# Altium PCB Scratch.PcbDoc
Units mil, origin at the board's own origin, x right, y up, seen from the top; angles counter-clockwise.
Board outline 5200 x 2700 mil, 2 copper layers (Top Layer, Bottom Layer), stack 61.756 mil thick; 63 components, 84 nets, 501 pads, 170 vias.
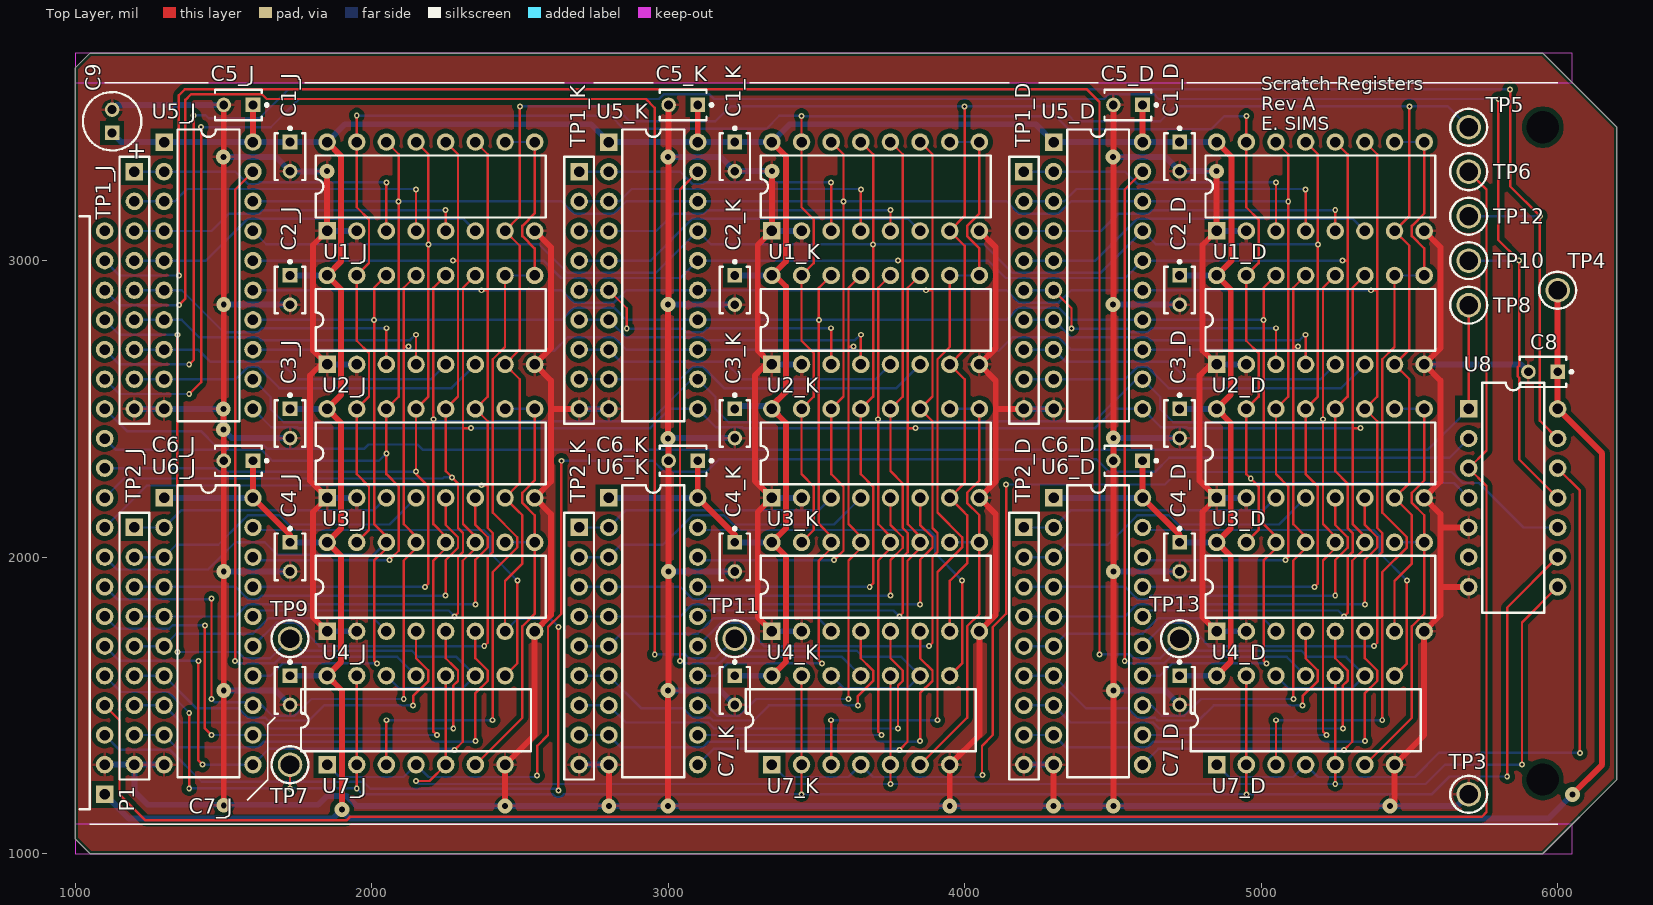
[diagram p0: Top Layer view]
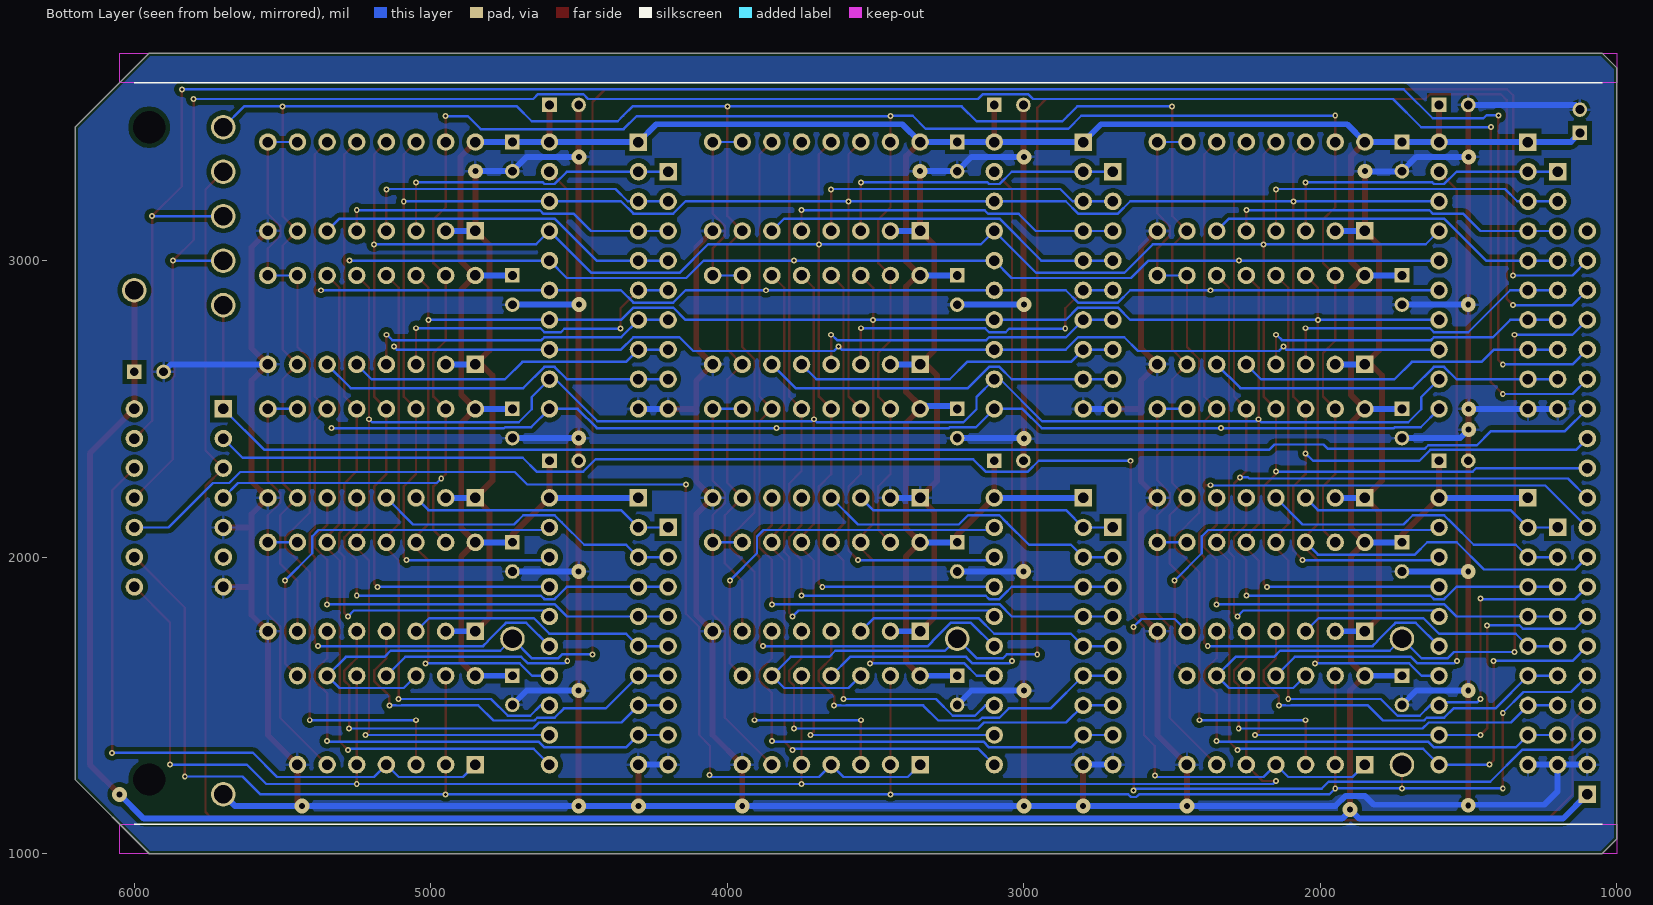
[diagram p1: Bottom Layer view, seen from below]

## Layer stack, top to bottom
Top Solder: solder mask 1, SM-001, Dk 4
Top Layer: signal copper 1.378
Dielectric 1: core 59, Core-043, Dk 4.3
Bottom Layer: signal copper 1.378
Bottom Solder: solder mask 1, SM-001, Dk 4

## Board outline
1000,1050 1050,1000 5950,1000 6200,1250 6200,3450 5950,3700 1050,3700 1000,3650

## Design rules (kind name [scope] priority, off if disabled: settings)
BoardOutlineClearance [All] p1: gap=10 ignorepadtopadclearanceinfootprint=FALSE except(0: Arc-SplitContinuation Track-SplitContinuation SMDPad-SplitContinuation THPad-SplitContinuation Via-SplitContinuation Fill-SplitContinuation Poly-SplitContinuation Region-SplitContinuation Text-SplitContinuation)
Clearance [InPoly] p1: gap=15 ignorepadtopadclearanceinfootprint=FALSE
Clearance Clearance_1 [All] p2: gap=8 ignorepadtopadclearanceinfootprint=FALSE
HoleSize [All] p1: absolutevalues=TRUE maxlimit=120 minlimit=1 maxpercent=80.000 minpercent=20.000
PolygonConnect [All] p1: connectstyle=Relief reliefconductorwidth=10 reliefentries=4 polygonreliefangle="90 Angle" airgapwidth=10
RoutingTopology [All] p1: topology=Daisy_Simple
RoutingVias "Schematic Routing Via Style" [InNetClass('PWR')] p1: holewidth=20 width=35 viastyle="Through Hole" minholewidth=20 minwidth=35 maxholewidth=20 maxwidth=50
RoutingVias [All] p2: holewidth=10 width=20 viastyle="Through Hole" minholewidth=10 minwidth=20 maxholewidth=10 maxwidth=20
SilkToSilkClearance [All] p1: silktosilkclearance=5
SilkToSolderMaskClearance [IsPad] p1: minsilkscreentomaskgap=8 clearancetoexposedcopper=TRUE
SolderMaskExpansion [All] p1: expansion=4 istentingtop=FALSE
UnRoutedNet [All] p1: checkbadconnections=TRUE
Width "Schematic Width Constraint" [InNetClass('PWR')] p1: maxlimit=50 minlimit=20 preferedwidth=20
Width [All] p2: maxlimit=8 minlimit=8 preferedwidth=8
25 further rules are at their usual default settings.

## Classes and differential pairs
net class PWR: GND VCC
net class BUS[0..7]: BUS0 BUS1 BUS2 BUS3 BUS4 BUS5 BUS6 BUS7
channel class Scratch_Register_16B: D J K
component class K: C1_K C2_K C3_K C4_K C5_K C6_K C7_K TP1_K TP2_K U1_K U2_K U3_K U4_K U5_K U6_K U7_K
component class D: C1_D C2_D C3_D C4_D C5_D C6_D C7_D TP1_D TP2_D U1_D U2_D U3_D U4_D U5_D U6_D U7_D
component class J: C1_J C2_J C3_J C4_J C5_J C6_J C7_J TP1_J TP2_J U1_J U2_J U3_J U4_J U5_J U6_J U7_J
component class Top: C8 C9 g P1 TP3 TP4 TP5 TP6 TP7 TP8 TP9 TP10 TP11 TP12 TP13 U8

## Components (designator, comment, footprint, x,y, rotation, side; value= is the part's Value field where it differs from the comment)
C1_D "K104K15X7RF5TL2" VISH-K104K15X7RF5TL2 4725,3350.79 r270 top locked (schematic designator C1)
C1_J "K104K15X7RF5TL2" VISH-K104K15X7RF5TL2 1725,3350.79 r270 top locked (schematic designator C1)
C1_K "K104K15X7RF5TL2" VISH-K104K15X7RF5TL2 3225,3350.79 r270 top locked (schematic designator C1)
C2_D "K104K15X7RF5TL2" VISH-K104K15X7RF5TL2 4725,2900.79 r270 top locked (schematic designator C2)
C2_J "K104K15X7RF5TL2" VISH-K104K15X7RF5TL2 1725,2900.79 r270 top locked (schematic designator C2)
C2_K "K104K15X7RF5TL2" VISH-K104K15X7RF5TL2 3225,2900.79 r270 top locked (schematic designator C2)
C3_D "K104K15X7RF5TL2" VISH-K104K15X7RF5TL2 4725,2450.79 r270 top locked (schematic designator C3)
C3_J "K104K15X7RF5TL2" VISH-K104K15X7RF5TL2 1725,2450.79 r270 top locked (schematic designator C3)
C3_K "K104K15X7RF5TL2" VISH-K104K15X7RF5TL2 3225,2450.79 r270 top locked (schematic designator C3)
C4_D "K104K15X7RF5TL2" VISH-K104K15X7RF5TL2 4725,2000.79 r270 top locked (schematic designator C4)
C4_J "K104K15X7RF5TL2" VISH-K104K15X7RF5TL2 1725,2000.79 r270 top locked (schematic designator C4)
C4_K "K104K15X7RF5TL2" VISH-K104K15X7RF5TL2 3225,2000.79 r270 top locked (schematic designator C4)
C5_D "K104K15X7RF5TL2" VISH-K104K15X7RF5TL2 4550.79,3525 r180 top locked (schematic designator C5)
C5_J "K104K15X7RF5TL2" VISH-K104K15X7RF5TL2 1550.79,3525 r180 top locked (schematic designator C5)
C5_K "K104K15X7RF5TL2" VISH-K104K15X7RF5TL2 3050.79,3525 r180 top locked (schematic designator C5)
C6_D "K104K15X7RF5TL2" VISH-K104K15X7RF5TL2 4550.79,2325 r180 top locked (schematic designator C6)
C6_J "K104K15X7RF5TL2" VISH-K104K15X7RF5TL2 1550.79,2325 r180 top locked (schematic designator C6)
C6_K "K104K15X7RF5TL2" VISH-K104K15X7RF5TL2 3050.79,2325 r180 top locked (schematic designator C6)
C7_D "K104K15X7RF5TL2" VISH-K104K15X7RF5TL2 4725,1550.79 r270 top locked (schematic designator C7)
C7_J "K104K15X7RF5TL2" VISH-K104K15X7RF5TL2 1725,1550.79 r270 top locked (schematic designator C7)
C7_K "K104K15X7RF5TL2" VISH-K104K15X7RF5TL2 3225,1550.79 r270 top locked (schematic designator C7)
C8 "K104K15X7RF5TL2" VISH-K104K15X7RF5TL2 5950.79,2625 r180 top locked
C9 "Cap Pol5" C5x7 1125,3470 r90 top locked value=10uF
P1 "Header 20H" HDR1X20H 1100,1200 r90 top
TP1_D "Header 9" HDR1X9 4200,3300 r270 top locked (schematic designator TP1)
TP1_J "Header 9" HDR1X9 1200,3300 r270 top locked (schematic designator TP1)
TP1_K "Header 9" HDR1X9 2700,3300 r270 top locked (schematic designator TP1)
TP2_D "Header 9" HDR1X9 4200,2100 r270 top locked (schematic designator TP2)
TP2_J "Header 9" HDR1X9 1200,2100 r270 top locked (schematic designator TP2)
TP2_K "Header 9" HDR1X9 2700,2100 r270 top locked (schematic designator TP2)
TP3 "GND" KSTN-5011_V 5700,1200 r0 top locked
TP4 "VCC" KSTN-5011_V 6000,2900 r0 top locked
TP5 "CLK" KSTN-5011_V 5700,3450 r0 top
TP6 "RST#" KSTN-5011_V 5700,3300 r0 top
TP7 "LM#" KSTN-5011_V 1725,1300 r0 top locked
TP8 "JI#" KSTN-5011_V 5700,2850 r0 top
TP9 "JO#" KSTN-5011_V 1725,1725 r0 top locked
TP10 "KI#" KSTN-5011_V 5700,3000 r0 top
TP11 "KO#" KSTN-5011_V 3225,1725 r0 top locked
TP12 "DI#" KSTN-5011_V 5700,3150 r0 top
TP13 "DO#" KSTN-5011_V 4725,1725 r0 top locked
U1_D "SN74LS173AN" N016D 5200,3250 r0 top locked (schematic designator U1)
U1_J "SN74LS173AN" N016D 2200,3250 r0 top locked (schematic designator U1)
U1_K "SN74LS173AN" N016D 3700,3250 r0 top locked (schematic designator U1)
U2_D "SN74LS173AN" N016D 5200,2800 r0 top locked (schematic designator U2)
U2_J "SN74LS173AN" N016D 2200,2800 r0 top locked (schematic designator U2)
U2_K "SN74LS173AN" N016D 3700,2800 r0 top locked (schematic designator U2)
U3_D "SN74LS173AN" N016D 5200,2350 r0 top locked (schematic designator U3)
U3_J "SN74LS173AN" N016D 2200,2350 r0 top locked (schematic designator U3)
U3_K "SN74LS173AN" N016D 3700,2350 r0 top locked (schematic designator U3)
U4_D "SN74LS173AN" N016D 5200,1900 r0 top locked (schematic designator U4)
U4_J "SN74LS173AN" N016D 2200,1900 r0 top locked (schematic designator U4)
U4_K "SN74LS173AN" N016D 3700,1900 r0 top locked (schematic designator U4)
U5_D "SN74LS245N" N020 4450,2950 r270 top (schematic designator U5)
U5_J "SN74LS245N" N020 1450,2950 r270 top locked (schematic designator U5)
U5_K "SN74LS245N" N020 2950,2950 r270 top locked (schematic designator U5)
U6_D "SN74LS245N" N020 4450,1750 r270 top locked (schematic designator U6)
U6_J "SN74LS245N" N020 1450,1750 r270 top locked (schematic designator U6)
U6_K "SN74LS245N" N020 2950,1750 r270 top locked (schematic designator U6)
U7_D "SN74LS00N" N014 5150,1450 r0 top locked (schematic designator U7)
U7_J "SN74LS00N" N014 2150,1450 r0 top locked (schematic designator U7)
U7_K "SN74LS00N" N014 3650,1450 r0 top locked (schematic designator U7)
U8 "SN74LS04N" N014 5850,2200 r270 top

## Footprints (in the part's own frame and the unit in brackets; to place one, negate y for a bottom-side part, rotate by r counter-clockwise, add the part's x,y. Pads: shape width x height; smd on the part's side, far side on the other; paste and mask are expansions set on the pad)
C5x7 [mm] "Capacitor; 2 Leads"
  rect 1.25x1.25 hole 0.75: 1(-1,0)
  round 1.25 hole 0.75: 2(1,0)
  silkscreen extent -2.5,-2.5 2.5,2.5, body extent -2.5,-2.5 2.5,2.5, height 7
HDR1X9 [mm] "Connector; Header; 9 Position"
  rect 1.5x1.5 hole 0.9: 1(0,0)
  round 1.5 hole 0.9: 2(2.54,0) 3(5.08,0) 4(7.62,0) 5(10.16,0) 6(12.7,0) 7(15.24,0) 8(17.78,0) 9(20.32,0)
  silkscreen extent -1.27,-1.27 21.59,1.27
HDR1X20H [mm] "Connector; Header; 20 Position; Right Angle"
  rect 1.5x1.5 hole 0.9: 1(0,0)
  round 1.5 hole 0.9: 2(2.54,0) 3(5.08,0) 4(7.62,0) 5(10.16,0) 6(12.7,0) 7(15.24,0) 8(17.78,0) 9(20.32,0) 10(22.86,0) 11(25.4,0) 12(27.94,0) 13(30.48,0) 14(33.02,0) 15(35.56,0) 16(38.1,0) 17(40.64,0) 18(43.18,0) 19(45.72,0) 20(48.26,0)
  silkscreen extent -1.27,1.27 49.53,2.16
KSTN-5011_V [mm] "Test Point, Dia 3.17mm"
  round 2.1 hole 1.6: 1(0,0)
  silkscreen extent -1.59,-1.58 1.59,1.58, body extent -1.59,-1.59 1.59,1.59, height 8.13
N014 [mm] "DIP; 14 Leads; Row Spacing 7.62 mm; Pitch 2.54 mm"
  rect 1.5x1.5 hole 0.9: 1(-7.62,-3.81)
  round 1.5 hole 0.9: 2(-5.08,-3.81) 3(-2.54,-3.81) 4(0,-3.81) 5(2.54,-3.81) 6(5.08,-3.81) 7(7.62,-3.81) 8(7.62,3.81) 9(5.08,3.81) 10(2.54,3.81) 11(0,3.81) 12(-2.54,3.81) 13(-5.08,3.81) 14(-7.62,3.81)
  silkscreen extent -9.85,-2.65 9.85,2.65, body extent -9.15,-5.08 9.15,5.12, height 7.88
N016D [mm] "DIP; 16 Leads; Row Spacing 7.62 mm; Pitch 2.54 mm"
  rect 1.5x1.5 hole 0.9: 1(-8.89,-3.81)
  round 1.5 hole 0.9: 2(-6.35,-3.81) 3(-3.81,-3.81) 4(-1.27,-3.81) 5(1.27,-3.81) 6(3.81,-3.81) 7(6.35,-3.81) 8(8.89,-3.81) 9(8.89,3.81) 10(6.35,3.81) 11(3.81,3.81) 12(1.27,3.81) 13(-1.27,3.81) 14(-3.81,3.81) 15(-6.35,3.81) 16(-8.89,3.81)
  silkscreen extent -9.85,-2.65 9.85,2.65, body extent -10.46,-5.08 10.46,5.12, height 7.88
N020 [mm] "DIP; 20 Leads; Row Spacing 7.62 mm; Pitch 2.54 mm"
  rect 1.5x1.5 hole 0.9: 1(-11.43,-3.81)
  round 1.5 hole 0.9: 2(-8.89,-3.81) 3(-6.35,-3.81) 4(-3.81,-3.81) 5(-1.27,-3.81) 6(1.27,-3.81) 7(3.81,-3.81) 8(6.35,-3.81) 9(8.89,-3.81) 10(11.43,-3.81) 11(11.43,3.81) 12(8.89,3.81) 13(6.35,3.81) 14(3.81,3.81) 15(1.27,3.81) 16(-1.27,3.81) 17(-3.81,3.81) 18(-6.35,3.81) 19(-8.89,3.81) 20(-11.43,3.81)
  silkscreen extent -12.5,-2.65 12.5,2.65, body extent -13.08,-5.08 13.08,5.12, height 7.88
VISH-K104K15X7RF5TL2 [mm] "THD, 2-Leads, Body 4x2.6mm"
  rect 1.25x1.25 hole 0.75: 1(-1.25,0)
  round 1.25 hole 0.75: 2(1.25,0)
  silkscreen extent -2.55,-1.3 2,1.3, body extent -2,-1.3 2,1.3, height 5.6

## Part data
C1_D C1_J C1_K C2_D C2_J C2_K C3_D C3_J C3_K C4_D C4_J C4_K C5_D C5_J C5_K C6_D C6_J C6_K C7_D C7_J C7_K C8: library part CMP-2000-06508-1, "Ceramic Capacitor, 100 nF, +/- 10%, 50 V, -55 to 125 degC, 2-Pin THD, RoHS, Tape and Reel", Capacitance=0.1µF, Manufacturer=Vishay, Operating Temperature=-55°C~125°C, Package / Case=Radial, Package Description="2-Pin Through Hole Device, Body 4 x 2.6 mm", Ratings=-, Standard Package=1, Temperature Coefficient=X7R, Tolerance=±10%, Voltage - Rated=50V, Applications=GeneralPurpose, Catalog Drawings=Mono-KapSide2-15_5.58Mono-KapSide1_15, Category=Capacitors, Datasheet URL=http://www.vishay.com/docs/45171/kseries.pdf, Datasheet Version=08/2013, Family=CeramicCapacitors, Features=-, Height - Seated (Max)="0.220\"(5.58mm)", Lead Spacing="0.098\"(2.50mm)", Lead Style=Straight, Manufacturer URL=http://www.vishay.com/, Mounting Technology=ThroughHole, Mounting Type=ThroughHole, Online Catalog=Mono-Kap™Series, Other Names=BC1084CT, Package Reference=K104K15X7RF5TL2, Packaging=CutTape(CT), Series=Mono-Kap™K, Size / Dimension="0.157\"Lx0.098\"W(4.00mmx2.50mm)", Thickness (Max)=-
C9: "Polarized Capacitor", LatestRevisionDate=17-Jul-2002, LatestRevisionNote="Re-released for DXP Platform.", PackageDescription="Polarized Capacitor; 2 Leads", PackageReference=POLAR0.8, Published=8-Jun-2000, Publisher="Altium Limited"
P1: "Header, 20-Pin, Right Angle", LatestRevisionDate=17-Jul-2002, LatestRevisionNote="Re-released for DXP Platform.", Publisher="Altium Limited", System=Connector
TP1_D TP1_J TP1_K TP2_D TP2_J TP2_K: "Header, 9-Pin", LatestRevisionDate=17-Jul-2002, LatestRevisionNote="Re-released for DXP Platform.", Publisher="Altium Limited"
TP3 TP4 TP5 TP6 TP7 TP8 TP9 TP10 TP11 TP12 TP13: library part TP
U1_D U1_J U1_K U2_D U2_J U2_K U3_D U3_J U3_K U4_D U4_J U4_K: "4-Bit D-Type Register with 3-State Outputs", Code_JEDEC=MS-001-BB, ComponentLink1Description="Manufacturer Link", ComponentLink1URL=http://www.ti.com/, ComponentLink2Description=Datasheet, ComponentLink2URL=http://www-s.ti.com/sc/ds/sn74ls173a.pdf, DatasheetVersion=Mar-1988, LatestRevisionDate=04-Mar-2005, LatestRevisionNote="Stylized 3D Model Added.", PackageDescription="DIP; 16 Leads; Row Spacing 7.62 mm; Pitch 2.54 mm", PackageReference=N016D, PackageVersion=Oct-1995, Published=8-Jun-2000, Publisher="Altium Limited"
U5_D U5_J U5_K U6_D U6_J U6_K: "Octal Bus Transceiver with 3-State Outputs", ComponentLink1Description="Manufacturer Link", ComponentLink1URL=http://www.ti.com/, ComponentLink2Description=Datasheet, ComponentLink2URL=http://www-s.ti.com/sc/ds/sn74ls245.pdf, DatasheetVersion=Mar-1988, LatestRevisionDate=04-Mar-2005, LatestRevisionNote="Stylized 3D Model Added.", PackageDescription="DIP; 20 Leads; Row Spacing 7.62 mm; Pitch 2.54 mm", PackageReference=N020, PackageVersion=Oct-1995, Published=8-Jun-2000, Publisher="Altium Limited"
U7_D U7_J U7_K: "Quadruple 2-Input Positive-NAND Gate", ComponentLink1Description="Manufacturer Link", ComponentLink1URL=http://www.ti.com/, ComponentLink2Description=Datasheet, ComponentLink2URL=http://www-s.ti.com/sc/ds/sn74ls00.pdf, DatasheetVersion=Mar-1988, LatestRevisionDate=04-Mar-2005, LatestRevisionNote="Stylized 3D Model Added.", PackageDescription="DIP; 14 Leads; Row Spacing 7.62 mm; Pitch 2.54 mm", PackageReference=N014, PackageVersion=Oct-1995, Published=8-Jun-2000, Publisher="Altium Limited"
U8: "Hex Inverter", ComponentLink1Description="Manufacturer Link", ComponentLink1URL=http://www.ti.com/, ComponentLink2Description=Datasheet, ComponentLink2URL=http://www-s.ti.com/sc/ds/sn74ls04.pdf, DatasheetVersion=Mar-1988, LatestRevisionDate=04-Mar-2005, LatestRevisionNote="Stylized 3D Model Added.", PackageDescription="DIP; 14 Leads; Row Spacing 7.62 mm; Pitch 2.54 mm", PackageReference=N014, PackageVersion=Oct-1995, Published=8-Jun-2000, Publisher="Altium Limited"

## Free pads (board coordinates)
  round 0 hole 109: ""(5950,1250) ""(5950,3450)

## Via types
v1: diameter 20, hole 10, Top Layer to Bottom Layer, tented both sides, 141 vias
v2: diameter 50, hole 20, Top Layer to Bottom Layer, tented both sides, 29 vias

## Nets (pads, with @x,y where several pads share a name; then routed paths per layer and width w, separated by ;. In a path a pad name is that pad's centre, name@x,y a point inside that pad or via, vN(x,y) a via of type N, cw(c..) or ccw(c..) an arc to the next point about the centre after c; other vN are vias at no path point)
BUS0: P1.13 U1_D.14 U1_J.14 U1_K.14 U3_D.14 U3_J.14 U3_K.14 U5_D.18 U5_J.18 U5_K.18 U6_D.18 U6_J.18 U6_K.18 | length 10380.8
  Top Layer w8: U1_J.14 2091.53,3358.47 v1(2091.53,3200) 2091.53,2541.53 U3_J.14 v1(2050,2350) 2050,2280 2091.53,2238.47 2091.53,2021.53 2070,2000 v1(2060,1990) ; U1_K.14 3591.53,3358.47 v1(3591.53,3200) 3591.53,2541.53 U3_K.14 3550,2280 3591.53,2238.47 3591.53,2021.53 3570,2000 v1(3560,1990) ; U1_D.14 5091.53,3358.47 v1(5091.53,3200) 5091.53,2541.53 U3_D.14 5050,2280 5091.53,2238.47 5091.53,2000 v1(5081.53,1990)
  Bottom Layer w8: P1.13 1138.39,2361.61 1629.58,2361.61 1666.18,2325 2025,2325 v1(2050,2350) ; U6_J.18 1610,1990 v1(2060,1990) ; U5_J.18 v1(2091.53,3200) 2641.27,3200 2682.8,3158.47 2717.2,3158.47 2817.2,3158.47 2858.73,3200 U5_K.18 v1(3591.53,3200) 4141.27,3200 4182.8,3158.47 4217.2,3158.47 4317.2,3158.47 4358.73,3200 U5_D.18 v1(5091.53,3200) ; U6_K.18 3110,1990 v1(3560,1990) ; U6_D.18 4610,1990 v1(5081.53,1990)
BUS1: P1.12 U1_D.13 U1_J.13 U1_K.13 U3_D.13 U3_J.13 U3_K.13 U5_D.17 U5_J.17 U5_K.17 U6_D.17 U6_J.17 U6_K.17 | length 11308.6
  Top Layer w8: U1_J.13 2191.53,3358.47 v1(2191.53,3055) 2191.53,2541.53 U3_J.13 v1(2150,2288.39) 2150,2280 2191.53,2238.47 2191.53,1911.53 v1(2180,1900) ; U1_K.13 3691.53,3358.47 v1(3691.53,3055) 3691.53,2541.53 U3_K.13 3650,2280 3691.53,2238.47 3691.53,1911.53 v1(3680,1900) ; U1_D.13 5191.53,3358.47 v1(5191.53,3055) 5191.53,2541.53 U3_D.13 5150,2280 5191.53,2238.47 5191.53,1911.53 v1(5180,1900)
  Bottom Layer w8: P1.12 1474.8,2300 1486.41,2288.39 v1(2150,2288.39) ; U6_J.17 v1(2180,1900) ; U5_J.17 1645,3055 v1(2191.53,3055) 2565,3055 2661.53,2958.47 2958.47,2958.47 U5_K.17 3145,3055 v1(3691.53,3055) 4065,3055 4161.53,2958.47 4458.47,2958.47 U5_D.17 4645,3055 v1(5191.53,3055) ; U6_K.17 v1(3680,1900) ; U6_D.17 v1(5180,1900)
BUS2: P1.11 U1_D.12 U1_J.12 U1_K.12 U3_D.12 U3_J.12 U3_K.12 U5_D.16 U5_J.16 U5_K.16 U6_D.16 U6_J.16 U6_K.16 | length 12121.9
  Top Layer w8: U1_J.12 2291.53,3358.47 2291.53,3000 ; v1(2275,3000) 2291.53,3000 ; v1(2280,1800) 2291.53,1811.53 2291.53,2000 2308.47,2016.94 2308.47,2081.53 2291.53,2098.47 2291.53,2248.47 2250,2290 U3_J.12 2291.53,2541.53 2291.53,3000 ; U1_K.12 3791.53,3358.47 3791.53,3000 ; v1(3775,3000) 3791.53,3000 ; v1(3780,1800) 3791.53,1811.53 3791.53,2000 3808.47,2016.94 3808.47,2081.53 3791.53,2098.47 3791.53,2248.47 3750,2290 U3_K.12 3791.53,2541.53 3791.53,3000 ; U1_D.12 5291.53,3358.47 5291.53,3000 ; v1(5275,3000) 5291.53,3000 ; v1(5280,1800) 5291.53,1811.53 5291.53,2000 5308.47,2016.94 5308.47,2081.53 5291.53,2098.47 5291.53,2248.47 5250,2290 U3_D.12 5291.53,2541.53 5291.53,3000
  Bottom Layer w8: P1.11 1165,2265 2240,2265 2244.24,2269.24 v1(2270.76,2269.24) ; U6_J.16 1620,1820 2260,1820 v1(2280,1800) ; U5_J.16 v1(2275,3000) 2580,3000 2638.47,2941.53 2717.2,2941.53 3041.53,2941.53 U5_K.16 v1(3775,3000) 4080,3000 4138.47,2941.53 4217.2,2941.53 4541.53,2941.53 U5_D.16 v1(5275,3000) ; U6_K.16 3120,1820 3760,1820 v1(3780,1800) ; U6_D.16 4620,1820 5260,1820 v1(5280,1800)
BUS3: P1.10 U1_D.11 U1_J.11 U1_K.11 U3_D.11 U3_J.11 U3_K.11 U5_D.15 U5_J.15 U5_K.15 U6_D.15 U6_J.15 U6_K.15 | length 13104.5
  Top Layer w8: U1_J.11 2391.53,3358.47 2391.53,2900 ; v1(2370,2900) 2391.53,2900 ; v1(2371.25,2242.51) 2391.53,2242.51 ; v1(2380,1700) 2391.53,1711.53 2391.53,2000 2408.47,2016.94 2408.47,2081.53 2391.53,2098.47 2391.53,2242.51 ; U1_K.11 3891.53,3358.47 3891.53,2900 ; v1(3870,2900) 3891.53,2900 ; v1(3880,1700) 3891.53,1711.53 3891.53,2000 3908.47,2016.94 3908.47,2081.53 3891.53,2098.47 3891.53,2458.47 U3_K.11 3891.53,2541.53 3891.53,2900 ; U1_D.11 5391.53,3358.47 5391.53,2900 ; v1(5370,2900) 5391.53,2900 ; v1(5380,1700) 5391.53,1711.53 5391.53,2000 5408.47,2016.94 5408.47,2081.53 5391.53,2098.47 5391.53,2458.47 U3_D.11 5391.53,2541.53 5391.53,2900 ; 2391.53,2242.51 2391.53,2458.47 U3_J.11 2391.53,2541.53 2391.53,2900
  Bottom Layer w8: P1.10 1241.53,2241.53 2368.47,2241.53 2370,2240 2370,2241.25 v1(2371.25,2242.51) ; U6_J.15 1678.34,1778.34 1747.09,1778.34 1762.72,1762.72 1808.47,1716.96 1808.47,1715.5 1823.97,1700 v1(2380,1700) ; U5_J.15 v1(2370,2900) 2641.27,2900 2682.8,2858.47 2717.2,2858.47 2817.2,2858.47 2858.73,2900 U5_K.15 v1(3870,2900) 4141.27,2900 4182.8,2858.47 4217.2,2858.47 4317.2,2858.47 4358.73,2900 U5_D.15 v1(5370,2900) ; U6_K.15 3178.34,1778.34 3247.09,1778.34 3262.72,1762.72 3308.47,1716.96 3308.47,1715.5 3323.97,1700 v1(3880,1700) ; U6_D.15 4678.34,1778.34 4747.09,1778.34 4762.72,1762.72 4808.47,1716.96 4808.47,1715.5 4823.97,1700 v1(5380,1700)
BUS4: P1.9 U2_D.14 U2_J.14 U2_K.14 U4_D.14 U4_J.14 U4_K.14 U5_D.14 U5_J.14 U5_K.14 U6_D.14 U6_J.14 U6_K.14 | length 9918
  Top Layer w8: v1(2018.47,1641.53) 2008.47,1651.53 2008.47,1988.47 2050,2030 U4_J.14 2050,2070 2008.47,2111.53 v1(2008.47,2800) 2008.47,2908.47 U2_J.14 ; v1(3518.47,1641.53) 3508.47,1651.53 3508.47,1988.47 3550,2030 U4_K.14 3550,2070 3508.47,2111.53 v1(3508.47,2800) 3508.47,2908.47 U2_K.14 ; v1(5018.47,1641.53) 5008.47,1651.53 5008.47,1988.47 5050,2030 U4_D.14 5050,2070 5008.47,2111.53 v1(5008.47,2800) 5008.47,2908.47 U2_D.14
  Bottom Layer w8: P1.9 1141.53,1958.47 1448.47,1958.47 1540,2050 1640,2050 1681.53,2008.47 2008.47,2008.47 U4_J.14 ; U6_J.14 1658.82,1600 1700.34,1641.53 v1(2018.47,1641.53) ; U5_J.14 v1(2008.47,2800) 2641.27,2800 2682.8,2841.53 2817.2,2841.53 2858.73,2800 U5_K.14 v1(3508.47,2800) 4141.27,2800 4182.8,2841.53 4317.2,2841.53 4358.73,2800 U5_D.14 v1(5008.47,2800) v1@5010,2800 ; U6_K.14 3158.82,1600 3200.34,1641.53 v1(3518.47,1641.53) ; U6_D.14 4658.82,1600 4700.34,1641.53 v1(5018.47,1641.53)
BUS5: P1.8 U2_D.13 U2_J.13 U2_K.13 U4_D.13 U4_J.13 U4_K.13 U5_D.13 U5_J.13 U5_K.13 U6_D.13 U6_J.13 U6_K.13 | length 10616.8
  Top Layer w8: v1(1460,1522) v1(1460,1860) ; v1(2108.47,1521.53) 2108.47,1988.47 2150,2030 U4_J.13 2150,2070 2108.47,2111.53 2108.47,2710 ; v1(2125,2710) 2108.47,2710 ; U2_J.13 2108.47,2908.47 2108.47,2710 ; v1(3608.47,1521.53) 3608.47,1988.47 3650,2030 U4_K.13 3650,2070 3608.47,2111.53 3608.47,2710 ; v1(3625,2710) 3608.47,2710 ; U2_K.13 3608.47,2908.47 3608.47,2710 ; v1(5108.47,1521.53) 5108.47,1988.47 5150,2030 U4_D.13 5150,2070 5108.47,2111.53 5108.47,2710 ; v1(5125,2710) 5108.47,2710 ; U2_D.13 5108.47,2908.47 5108.47,2710
  Bottom Layer w8: P1.8 1141.53,1858.47 1458.47,1858.47 v1(1460,1860) ; v1(1460,1522) 1472,1510 1590,1510 U6_J.13 1630,1500 1665.03,1464.97 1740.16,1464.97 1796.72,1521.53 v1(2108.47,1521.53) ; U5_J.13 2115,2700 v1(2125,2710) 2140,2695 2615,2695 2661.53,2741.53 2817.2,2741.53 2858.73,2700 U5_K.13 3615,2700 v1(3625,2710) 3640,2695 4115,2695 4161.53,2741.53 4317.2,2741.53 4358.73,2700 U5_D.13 5115,2700 v1(5125,2710) ; U6_K.13 3130,1500 3165.03,1464.97 3240.16,1464.97 3296.72,1521.53 v1(3608.47,1521.53) ; U6_D.13 4630,1500 4665.03,1464.97 4740.16,1464.97 4796.72,1521.53 v1(5108.47,1521.53)
BUS6: P1.7 U2_D.12 U2_J.12 U2_K.12 U4_D.12 U4_J.12 U4_K.12 U5_D.12 U5_J.12 U5_K.12 U6_D.12 U6_J.12 U6_K.12 | length 11558.1
  Top Layer w8: v1(1438,1770) 1440,1770 1438,1768 1438,1422 v1(1460,1400) ; v1(2220,1400) 2208.47,1411.53 2208.47,1988.47 2250,2030 U4_J.12 2250,2070 2208.47,2111.53 v1(2208.47,2465) 2208.47,2908.47 U2_J.12 ; v1(3720,1400) 3708.47,1411.53 3708.47,1988.47 3750,2030 U4_K.12 3750,2070 3708.47,2111.53 v1(3708.47,2465) 3708.47,2908.47 U2_K.12 ; v1(5220,1400) 5208.47,1411.53 5208.47,1988.47 5250,2030 U4_D.12 5250,2070 5208.47,2111.53 v1(5208.47,2465) 5208.47,2908.47 U2_D.12
  Bottom Layer w8: P1.7 1141.53,1758.47 1217.2,1758.47 1317.2,1758.47 1328.73,1770 v1(1438,1770) ; v1(1460,1400) U6_J.12 v1(2220,1400) ; U5_J.12 1660,2540 1660,2498.82 1703.82,2455 2200,2455 2208.47,2463.47 v1(2208.47,2465) 2215,2458.47 2938.47,2458.47 3080,2600 U5_K.12 3160,2540 3160,2498.82 3203.82,2455 3698.47,2455 v1(3708.47,2465) 3715,2458.47 4438.47,2458.47 4580,2600 U5_D.12 4660,2540 4660,2498.82 4703.82,2455 5198.47,2455 v1(5208.47,2465) ; U6_K.12 v1(3720,1400) ; U6_D.12 v1(5220,1400)
BUS7: P1.6 U2_D.11 U2_J.11 U2_K.11 U4_D.11 U4_J.11 U4_K.11 U5_D.11 U5_J.11 U5_K.11 U6_D.11 U6_J.11 U6_K.11 | length 11912.3
  Top Layer w8: v1(1416,1650) 1416,1314 v1(1430,1300) ; v1(2280,1350) 2307.53,1377.53 2307.53,1987.53 2350,2030 U4_J.11 2350,2070 2308.47,2111.53 2308.47,2435 ; v1(2335,2435) 2308.47,2435 ; U2_J.11 2308.47,2908.47 2308.47,2435 ; v1(3780,1350) 3807.53,1377.53 3807.53,1987.53 3850,2030 U4_K.11 3850,2070 3808.47,2111.53 3808.47,2435 ; v1(3835,2435) 3808.47,2435 ; U2_K.11 3808.47,2908.47 3808.47,2435 ; v1(5280,1350) 5307.53,1377.53 5307.53,1987.53 5350,2030 U4_D.11 5350,2070 5308.47,2111.53 5308.47,2435 ; v1(5335,2435) 5308.47,2435 ; U2_D.11 5308.47,2908.47 5308.47,2435
  Bottom Layer w8: P1.6 1150,1650 v1(1416,1650) ; v1(1430,1300) U6_J.11 1653.34,1353.34 2276.66,1353.34 v1(2280,1350) ; U5_J.11 1661.82,2438.18 1750,2438.18 1753.18,2435 v1(2335,2435) 2940,2435 3005,2500 U5_K.11 3161.82,2438.18 3250,2438.18 3253.18,2435 v1(3835,2435) 4440,2435 4505,2500 U5_D.11 4661.82,2438.18 4750,2438.18 4753.18,2435 v1(5335,2435) ; U6_K.11 3153.34,1353.34 3776.66,1353.34 v1(3780,1350) ; U6_D.11 4653.34,1353.34 5276.66,1353.34 v1(5280,1350)
CLK: P1.3 TP5.1 U1_D.7 U1_J.7 U1_K.7 U2_D.7 U2_J.7 U2_K.7 U3_D.7 U3_J.7 U3_K.7 U4_D.7 U4_J.7 U4_K.7 | length 11446.6
  Top Layer w8: U4_J.7 2450,1920 2508.47,1978.47 2508.47,2141.53 2492.6,2157.4 U3_J.7 2500,2250 2500,2600 U2_J.7 2500,2700 2500,3050 U1_J.7 2500,3150 v1(2500,3520) ; v1(2630,1213) v1(2630,1765) ; U4_K.7 3950,1920 4008.47,1978.47 4008.47,2141.53 3992.6,2157.4 U3_K.7 4000,2250 4000,2600 U2_K.7 4000,2700 4000,3050 U1_K.7 4000,3150 v1(4000,3520) ; U4_D.7 5450,1920 5508.47,1978.47 5508.47,2141.53 5492.6,2157.4 U3_D.7 5500,2250 5500,2600 U2_D.7 5500,2700 5500,3050 U1_D.7 5500,3150 v1(5500,3520)
  Bottom Layer w8: P1.3 1150,1350 1320,1350 1427.53,1242.47 1972.53,1242.47 1996,1219 2626,1219 2630,1215 v1(2630,1213) ; U4_J.7 2491.53,1791.53 2603.47,1791.53 v1(2630,1765) ; v1(2500,3520) 2820,3520 2851.61,3488.39 2870,3470 3160,3470 3210,3520 v1(4000,3520) 4320,3520 4351.61,3488.39 4370,3470 4660,3470 4710,3520 v1(5500,3520) 5630,3520 TP5.1
DI: U7_D.1 U7_D.4 U8.12 | length 2301.4
  Top Layer w8: U8.12 6075,2225 v1(6075,1340)
  Bottom Layer w8: U7_D.1 4891.53,1258.47 5108.47,1258.47 U7_D.4 5191.53,1258.47 5518.47,1258.47 5600,1340 v1(6075,1340)
DI#: P1.16 TP12.1 U8.13 | length 7120.4
  Top Layer w8: v1(1385,2650) 1400,2665 v1(1400,3490) ; v1(5840,3577.61) 5840,3250 v1(5940,3150) 5940,2460 U8.13
  Bottom Layer w8: P1.16 1150,2650 v1(1385,2650) ; v1(1400,3490) 1440,3490 1450,3480 1621.18,3480 1718.79,3577.61 v1(5840,3577.61) ; TP12.1 v1(5940,3150)
DO#: P1.19 TP13.1 U7_D.9 U7_D.12 | length 7186.6
  Top Layer w8: v1(1350,2950) 1350,3557.61 1370,3577.61 4412.39,3577.61 4455,3535 v1(4455,1672)
  Bottom Layer w8: P1.19 1150,2950 v1(1350,2950) ; v1(4455,1672) 4558,1672 4571.53,1658.47 4658.47,1658.47 TP13.1 4766,1684 5136,1684 5156.47,1663.53 5286.47,1663.53 U7_D.9 5308.47,1558.47 5091.53,1558.47 U7_D.12
GND: C1_D.2 C1_J.2 C1_K.2 C2_D.2 C2_J.2 C2_K.2 C3_D.2 C3_J.2 C3_K.2 C4_D.2 C4_J.2 C4_K.2 C5_D.2 C5_J.2 C5_K.2 C6_D.2 C6_J.2 C6_K.2 C7_D.2 C7_J.2 C7_K.2 C8.2 C9.2 P1.2 TP1_D.9 TP1_J.9 TP1_K.9 TP2_D.9 TP2_J.9 TP2_K.9 TP3.1 U1_D.1 U1_D.2 U1_D.8 U1_J.1 U1_J.2 U1_J.8 U1_K.1 U1_K.2 U1_K.8 U2_D.1 U2_D.2 U2_D.8 U2_J.1 U2_J.2 U2_J.8 U2_K.1 U2_K.2 U2_K.8 U3_D.1 U3_D.2 U3_D.8 U3_J.1 U3_J.2 U3_J.8 U3_K.1 U3_K.2 U3_K.8 U4_D.1 U4_D.2 U4_D.8 U4_J.1 U4_J.2 U4_J.8 U4_K.1 U4_K.2 U4_K.8 U5_D.10 U5_J.10 U5_K.10 U6_D.10 U6_J.10 U6_K.10 U7_D.7 U7_J.7 U7_K.7 U8.5 U8.7 | length 30518
  Top Layer w20: v2(1501.57,1163) v2(1501.57,1550) v2(1501.57,1951.57) C6_J.2 1501.57,2428.43 v2(1500,2430) 1500,2498.43 1501.57,2500 v2(1501.57,2851.57) 1501.57,3348.43 v2(1500,3350) 1501.57,3351.57 C5_J.2 ; U3_J.1@1840,2210 1792.47,2257.53 1792.47,2612.47 U2_J.1@1840,2660 ; U4_J.1 1802.47,1797.53 1802.47,2152.47 U3_J.1 ; U2_J.1 U2_J.1@1840,2660 ; v2(1850,3301.57) U1_J.1 1802.47,3052.47 1802.47,2697.53 U2_J.1@1840,2660 ; v2(2450,1161) U7_J.7 2550,1400 U4_J.8 2605,1805 2605,2145 U3_J.8 2605,2255 2605,2500 ; U1_J.8 2605,3045 2605,2705 U2_J.8 2605,2595 2605,2500 ; TP1_K.9 2605,2500 ; v2(2800,1161) U6_K.10 ; v2(3000,1161) v2(3000,1550) 3001.57,1551.57 v2(3001.57,1951.57) C6_K.2 3001.57,2398.43 v2(3000,2400) 3000,2850 3001.57,2851.57 3001.57,3348.43 v2(3000,3350) 3001.57,3351.57 C5_K.2 ; U3_K.1@3340,2210 3292.47,2257.53 3292.47,2612.47 U2_K.1@3340,2660 ; U4_K.1 3302.47,1797.53 3302.47,2152.47 U3_K.1 ; U2_K.1 U2_K.1@3340,2660 ; v2(3350,3301.57) U1_K.1 3302.47,3052.47 3302.47,2697.53 U2_K.1@3340,2660 ; v2(3950,1161) U7_K.7 4050,1400 U4_K.8 4105,1805 4105,2145 U3_K.8 4105,2255 4105,2500 ; U1_K.8 4105,3045 4105,2705 U2_K.8 4105,2595 4105,2500 ; TP1_D.9 4105,2500 ; v2(4300,1161) U6_D.10 ; v2(4501.57,1161) v2(4501.57,1550) v2(4501.57,1951.57) C6_D.2 4501.57,2396.57 v2@4504,2399 ; C5_D.2 4501.57,3351.57 v2(4500,3350) 4501.57,3348.43 4501.57,2403.43 4505,2400 v2@4504,2399 ; v2@4503,2400 v2@4504,2399 ; U3_D.1@4840,2210 4792.47,2257.53 4792.47,2612.47 U2_D.1@4840,2660 ; U4_D.1 4802.47,1797.53 4802.47,2152.47 U3_D.1 ; U2_D.1 U2_D.1@4840,2660 ; v2(4850,3301.57) U1_D.1 4802.47,3052.47 4802.47,2697.53 U2_D.1@4840,2660 ; v2(5435,1161) 5435.5,1160.5 5450,1175 U7_D.7 5550,1400 U4_D.8 5605,1805 5605,1900 ; U1_D.8 5605,3045 5605,2705 U2_D.8 5605,2595 5605,2255 U3_D.8 5605,2145 5605,2100 ; U8.7 5605,1900 ; U8.5 5605,2100 ; 5605,1900 5605,2100
  Bottom Layer w20: P1.2 TP2_J.9 ; C9.2 1140.63,3525 C5_J.2 ; TP1_J.9 U5_J.10 v2(1500,2500) ; U6_J.10 TP2_J.9 ; v2@1500,1550 v2(1501.57,1550) 1676.57,1550 C7_J.2 ; v2@1500,1951.57 v2(1501.57,1951.57) C4_J.2 ; v2(1500,2430) 1528.43,2401.57 C3_J.2 ; v2(1500,3350) 1676.57,3350 C1_J.2 1726.57,3300 1850,3300 v2(1850,3301.57) ; v2(1501.57,1163) v2@1501.57,1165 ; v2(1501.57,2851.57) C2_J.2 ; U4_J.1 U4_J.2 ; U3_J.1 U3_J.2 ; U2_J.1 U2_J.2 ; U1_J.1 U1_J.2 ; v2(2450,1161) 1949,1161 1915,1195 1850,1195 1820,1165 v2@1501.57,1165 ; v2@2453,1158 2456,1161 v2(2800,1161) v2(3000,1161) 3944,1161 v2@3947,1158 ; TP2_K.9 U6_K.10 ; TP1_K.9 U5_K.10 ; v2(3000,1550) 3176.57,1550 C7_K.2 ; v2@3000,1951.57 v2(3001.57,1951.57) C4_K.2 ; v2(3000,2400) 3001.57,2401.57 C3_K.2 ; v2(3000,2851.57) C2_K.2 ; v2(3000,3350) 3176.57,3350 C1_K.2 v2(3350,3301.57) ; U4_K.1 U4_K.2 ; U3_K.1 U3_K.2 ; U2_K.1 U2_K.2 ; U1_K.1 U1_K.2 ; v2(3950,1161) v2@3947,1158 ; TP2_D.9 U6_D.10 ; TP1_D.9 U5_D.10 ; v2(4300,1161) v2@4300.5,1160.5 ; v2@4500,1550 v2(4501.57,1550) 4676.57,1550 C7_D.2 ; v2@4500,1951.57 v2(4501.57,1951.57) C4_D.2 ; v2(4500,2851.57) C2_D.2 ; v2(4500,3350) 4676.57,3350 C1_D.2 v2(4850,3301.57) ; v2(4501.57,2401.57) C3_D.2 ; U4_D.1 U4_D.2 ; U3_D.1 U3_D.2 ; U2_D.1 U2_D.2 ; U1_D.1 U1_D.2 ; v2(5435,1161) v2@5435,1160 ; U2_D.8 5876.57,2650 C8.2 ; TP3.1 5660,1160 v2@5435,1160 ; TP2_J.9 1200,1210 1245,1165 v2@1501.57,1165 ; v2@3947,1158 3950,1155 3956,1161 3957,1160 4300,1160 v2@4300.5,1160.5 ; v2@4300.5,1160.5 4301,1161 v2(4501.57,1161) 4502.57,1160 v2@5435,1160
JI: U7_J.1 U7_J.4 U8.2 | length 5016.2
  Top Layer w8: v1(2558.47,1263) 2558.47,1363.47 2595,1400 2595,1763.89 2640,1808.89 v1(2640,2325)
  Bottom Layer w8: U7_J.1 1891.53,1258.47 2108.47,1258.47 U7_J.4 2191.53,1258.47 2558.47,1258.47 v1(2558.47,1263) ; v1(2640,2325) 2949.8,2325 2986.41,2288.39 3129.58,2288.39 3171.18,2330 4444.8,2330 4486.41,2288.39 4643.39,2288.39 4690,2335 5635,2335 U8.2
JI#: P1.14 TP8.1 U8.1 | length 5085.8
  Top Layer w8: U8.1 TP8.1 TP8.1@5700,2858.66
  Bottom Layer w8: P1.14 1175,2425 1425,2425 1472.39,2377.61 1636.2,2377.61 1648.84,2364.97 1975,2364.97 1990.03,2380 2155,2380 2173.39,2361.61 5561.61,2361.61 U8.1
JO#: P1.17 TP9.1 U7_J.9 U7_J.12 | length 2768.4
  Top Layer w8: v1(1345,1680) v1(1345,2750)
  Bottom Layer w8: P1.17 1150,2750 v1(1345,2750) v1@1350,2750 ; v1(1345,1680) 1550,1680 1571.53,1658.47 1658.47,1658.47 TP9.1 1766,1684 2136,1684 2156.47,1663.53 2286.47,1663.53 U7_J.9 2308.47,1558.47 2091.53,1558.47 U7_J.12
KI: U7_K.1 U7_K.4 U8.10 | length 3733.6
  Top Layer w8: v1(4060,1265) 4058.47,1266.53 4058.47,1363.47 4095,1400 4095,1763.89 4140,1808.89 v1(4140,2245)
  Bottom Layer w8: U7_K.1 3391.53,1258.47 3608.47,1258.47 U7_K.4 3691.53,1258.47 4053.47,1258.47 v1(4060,1265) ; v1(4140,2245) 4675,2245 4717,2287 5643,2287 5680,2250 5735,2250 5885,2100 U8.10
KI#: P1.15 TP10.1 U8.11 | length 7266.2
  Top Layer w8: v1(1385,2550) 1425,2590 v1(1425,3450) ; v1(5800,3545) 5800,3070 v1(5870,3000) 5870,2645.2 5864.97,2640.16 5864.97,2609.84 5870,2604.8 5870,2330 U8.11
  Bottom Layer w8: P1.15 1150,2550 v1(1385,2550) ; v1(1425,3450) 1660,3450 1755,3545 2969.8,3545 2986.41,3561.61 3138.39,3561.61 3155,3545 4469.8,3545 4486.41,3561.61 4638.39,3561.61 4655,3545 v1(5800,3545) ; TP10.1 v1(5870,3000)
KO#: P1.18 TP11.1 U7_K.9 U7_K.12 | length 5739.6
  Top Layer w8: v1(1350,2850) 1372,2872 1372,3542 1391.61,3561.61 1629.58,3561.61 1646.18,3545 2925,3545 2955,3515 v1(2955,1672)
  Bottom Layer w8: P1.18 1150,2850 v1(1350,2850) ; v1(2955,1672) 3058,1672 3071.53,1658.47 3158.47,1658.47 TP11.1 3266,1684 3636,1684 3656.47,1663.53 3786.47,1663.53 U7_K.9 3808.47,1558.47 3591.53,1558.47 U7_K.12
LM: U7_D.5 U7_D.10 U7_J.5 U7_J.10 U7_K.5 U7_K.10 U8.8 | length 5563.6
  Top Layer w8: v1(2150,1245) 2195,1245 U7_J.5 U7_J.10 ; v1(3750,1235) U7_K.5 U7_K.10 ; v1(5250,1235) U7_D.5 U7_D.10 ; v1(5880,1300) 5880,1780 U8.8
  Bottom Layer w8: v1(2150,1245) 2160,1235 v1(3750,1235) v1(5250,1235) 5555,1235 5620,1300 v1(5880,1300)
LM#: P1.5 TP7.1 U7_D.2 U7_D.13 U7_J.2 U7_J.13 U7_K.2 U7_K.13 U8.9 | length 7157.8
  Top Layer w8: v1(1385,1220) v1(1385,1475) ; v1@1725,1215 v1(1725,1220) TP7.1 ; v1@1950,1215 v1(1950,1220) U7_J.2 U7_J.13 ; v1(3450,1200) U7_K.2 U7_K.13 ; v1(4950,1200) U7_D.2 U7_D.13 ; v1(5830,1260) 5830,1830 U8.9
  Bottom Layer w8: P1.5 1155,1545 1315,1545 v1(1385,1475) ; v1(1385,1220) v1(1725,1220) v1(1950,1220) 1970,1200 2611.89,1200 2620.89,1191 2639.11,1191 2648.11,1200 v1(3450,1200) v1(4950,1200) 5575,1200 5635,1260 v1(5830,1260)
LOAD_LSB#_D: U1_D.9 U1_D.10 U2_D.9 U2_D.10 U7_D.3 | length 2778.9
  Top Layer w8: U7_D.3 v1(5050,1450) ; v1(5408.47,1450) 5408.47,1949.74 5491.53,2032.8 5491.53,2067.2 5408.47,2150.26 5408.47,2667.2 5450,2708.73 U2_D.10 ; U2_D.9 5550,3041.27 5508.47,3082.8 5508.47,3117.2 5550,3158.73 U1_D.9
  Bottom Layer w8: v1(5050,1450) v1(5408.47,1450) ; U2_D.10 U2_D.9 ; U1_D.10 U1_D.9
LOAD_LSB#_J: U1_J.9 U1_J.10 U2_J.9 U2_J.10 U7_J.3 | length 2778.9
  Top Layer w8: U7_J.3 v1(2050,1450) ; v1(2408.47,1450) 2408.47,1949.74 2491.53,2032.8 2491.53,2067.2 2408.47,2150.26 2408.47,2667.2 2450,2708.73 U2_J.10 ; U2_J.9 2550,3041.27 2508.47,3082.8 2508.47,3117.2 2550,3158.73 U1_J.9
  Bottom Layer w8: v1(2050,1450) v1(2408.47,1450) ; U2_J.10 U2_J.9 ; U1_J.10 U1_J.9
LOAD_LSB#_K: U1_K.9 U1_K.10 U2_K.9 U2_K.10 U7_K.3 | length 2778.9
  Top Layer w8: U7_K.3 v1(3550,1450) ; v1(3908.47,1450) 3908.47,1949.74 3991.53,2032.8 3991.53,2067.2 3908.47,2150.26 3908.47,2667.2 3950,2708.73 U2_K.10 ; U2_K.9 4050,3041.27 4008.47,3082.8 4008.47,3117.2 4050,3158.73 U1_K.9
  Bottom Layer w8: v1(3550,1450) v1(3908.47,1450) ; U2_K.10 U2_K.9 ; U1_K.10 U1_K.9
LOAD_MSB#_D: U3_D.9 U3_D.10 U4_D.9 U4_D.10 U7_D.6 | length 1517.2
  Top Layer w8: U7_D.6 5508.47,1458.47 5508.47,1767.2 5550,1808.73 U4_D.9 5550,2141.27 5508.47,2182.8 5508.47,2217.2 5550,2258.73 U3_D.9
  Bottom Layer w8: U4_D.10 U4_D.9 ; U3_D.10 U3_D.9
LOAD_MSB#_J: U3_J.9 U3_J.10 U4_J.9 U4_J.10 U7_J.6 | length 1517.2
  Top Layer w8: U7_J.6 2508.47,1458.47 2508.47,1767.2 2550,1808.73 U4_J.9 2550,2141.27 2508.47,2182.8 2508.47,2217.2 2550,2258.73 U3_J.9
  Bottom Layer w8: U4_J.10 U4_J.9 ; U3_J.10 U3_J.9
LOAD_MSB#_K: U3_K.9 U3_K.10 U4_K.9 U4_K.10 U7_K.6 | length 1517.2
  Top Layer w8: U7_K.6 4008.47,1458.47 4008.47,1767.2 4050,1808.73 U4_K.9 4050,2141.27 4008.47,2182.8 4008.47,2217.2 4050,2258.73 U3_K.9
  Bottom Layer w8: U4_K.10 U4_K.9 ; U3_K.10 U3_K.9
OUT_LSB#_D: U5_D.19 U7_D.11 | length 2323.8
  Top Layer w8: v1(4540,1650) 4540,3240 U5_D.19
  Bottom Layer w8: v1(4540,1650) 4548.47,1641.53 4673,1641.53 4695,1663.53 5086.47,1663.53 U7_D.11
OUT_LSB#_J: U5_J.19 U7_J.11 | length 2323.8
  Top Layer w8: v1(1540,1650) 1540,3240 U5_J.19
  Bottom Layer w8: v1(1540,1650) 1548.47,1641.53 1673,1641.53 1695,1663.53 2086.47,1663.53 U7_J.11
OUT_LSB#_K: U5_K.19 U7_K.11 | length 2323.8
  Top Layer w8: v1(3040,1650) 3040,3240 U5_K.19
  Bottom Layer w8: v1(3040,1650) 3048.47,1641.53 3173,1641.53 3195,1663.53 3586.47,1663.53 U7_K.11
OUT_MSB#_D: U6_D.19 U7_D.8 | length 1337.5
  Top Layer w8: U7_D.8 5491.53,1641.53 v1(5491.53,1921.53)
  Bottom Layer w8: U6_D.19 4608.47,2091.53 5378.47,2091.53 5400,2070 5400,2013.06 v1(5491.53,1921.53)
OUT_MSB#_J: U6_J.19 U7_J.8 | length 1337.5
  Top Layer w8: U7_J.8 2491.53,1641.53 v1(2491.53,1921.53)
  Bottom Layer w8: U6_J.19 1608.47,2091.53 2378.47,2091.53 2400,2070 2400,2013.06 v1(2491.53,1921.53)
OUT_MSB#_K: U6_K.19 U7_K.8 | length 1337.5
  Top Layer w8: U7_K.8 3991.53,1641.53 v1(3991.53,1921.53)
  Bottom Layer w8: U6_K.19 3108.47,2091.53 3878.47,2091.53 3900,2070 3900,2013.06 v1(3991.53,1921.53)
REG0_D: TP1_D.1 U1_D.3 U5_D.2 | length 1038.7
  Top Layer w8: U1_D.3 v1(5050,3263.53)
  Bottom Layer w8: TP1_D.1 U5_D.2 4541.27,3300 4582.8,3258.47 4617.2,3258.47 4623.3,3264.57 5045.43,3264.57 5050,3260 v1(5050,3263.53)
REG0_J: TP1_J.1 U1_J.3 U5_J.2 | length 1038.7
  Top Layer w8: U1_J.3 v1(2050,3263.53)
  Bottom Layer w8: TP1_J.1 U5_J.2 1541.27,3300 1582.8,3258.47 1617.2,3258.47 1623.3,3264.57 2045.43,3264.57 2050,3260 v1(2050,3263.53)
REG0_K: TP1_K.1 U1_K.3 U5_K.2 | length 1038.7
  Top Layer w8: U1_K.3 v1(3550,3263.53)
  Bottom Layer w8: TP1_K.1 U5_K.2 3041.27,3300 3082.8,3258.47 3117.2,3258.47 3123.3,3264.57 3545.43,3264.57 3550,3260 v1(3550,3263.53)
REG1_D: TP1_D.2 U1_D.4 U5_D.3 | length 1107.8
  Top Layer w8: U1_D.4 v1(5150,3240)
  Bottom Layer w8: TP1_D.2 U5_D.3 4336.1,3200 4377.63,3241.53 5148.47,3241.53 v1(5150,3240)
REG1_J: TP1_J.2 U1_J.4 U5_J.3 | length 1107.8
  Top Layer w8: U1_J.4 v1(2150,3240)
  Bottom Layer w8: TP1_J.2 U5_J.3 1336.1,3200 1377.63,3241.53 2148.47,3241.53 v1(2150,3240)
REG1_K: TP1_K.2 U1_K.4 U5_K.3 | length 1107.8
  Top Layer w8: U1_K.4 v1(3650,3240)
  Bottom Layer w8: TP1_K.2 U5_K.3 2836.1,3200 2877.63,3241.53 3648.47,3241.53 v1(3650,3240)
REG2_D: TP1_D.3 U1_D.5 U5_D.4 | length 1149
  Top Layer w8: U1_D.5 v1(5250,3170)
  Bottom Layer w8: TP1_D.3 U5_D.4 4460,3100 4517.53,3157.53 4620,3157.53 4632.47,3170 v1(5250,3170)
REG2_J: TP1_J.3 U1_J.5 U5_J.4 | length 1149
  Top Layer w8: U1_J.5 v1(2250,3170)
  Bottom Layer w8: TP1_J.3 U5_J.4 1460,3100 1517.53,3157.53 1620,3157.53 1632.47,3170 v1(2250,3170)
REG2_K: TP1_K.3 U1_K.5 U5_K.4 | length 1149
  Top Layer w8: U1_K.5 v1(3750,3170)
  Bottom Layer w8: TP1_K.3 U5_K.4 2960,3100 3017.53,3157.53 3120,3157.53 3132.47,3170 v1(3750,3170)
REG3_D: TP1_D.4 U1_D.6 U5_D.5 | length 1225.8
  Bottom Layer w8: TP1_D.4 U5_D.5 4441.27,3000 4582.8,3141.53 5308.47,3141.53 U1_D.6
REG3_J: TP1_J.4 U1_J.6 U5_J.5 | length 1225.8
  Bottom Layer w8: TP1_J.4 U5_J.5 1441.27,3000 1582.8,3141.53 2308.47,3141.53 U1_J.6
REG3_K: TP1_K.4 U1_K.6 U5_K.5 | length 1225.8
  Bottom Layer w8: TP1_K.4 U5_K.5 2941.27,3000 3082.8,3141.53 3808.47,3141.53 U1_K.6
REG4_D: TP1_D.5 U2_D.3 U5_D.6 | length 1077.7
  Top Layer w8: U5_D.6 4360.56,2839.44 v1(4360.56,2770.56) ; U2_D.3 v1(5050,2772)
  Bottom Layer w8: TP1_D.5 U5_D.6 ; v1(4360.56,2770.56) 4360,2770 4550,2770 4561.53,2758.47 4617.2,2758.47 4630.73,2772 v1(5050,2772)
REG4_J: TP1_J.5 U2_J.3 U5_J.6 | length 1036.2
  Top Layer w8: U2_J.3 v1(2050,2772)
  Bottom Layer w8: TP1_J.5 U5_J.6 1360,2900 1501.53,2758.47 1617.2,2758.47 1630.73,2772 v1(2050,2772)
REG4_K: TP1_K.5 U2_K.3 U5_K.6 | length 1077.7
  Top Layer w8: U5_K.6 2860.56,2839.44 v1(2860.56,2770.56) ; U2_K.3 v1(3550,2772)
  Bottom Layer w8: TP1_K.5 U5_K.6 ; v1(2860.56,2770.56) 2860,2770 3050,2770 3061.53,2758.47 3117.2,2758.47 3130.73,2772 v1(3550,2772)
REG5_D: TP1_D.6 U2_D.4 U5_D.7 | length 1085.6
  Top Layer w8: U2_D.4 v1(5150,2750)
  Bottom Layer w8: TP1_D.6 U5_D.7 4358.47,2741.53 4617.2,2741.53 4626.73,2732 5130,2732 5148,2750 v1(5150,2750)
REG5_J: TP1_J.6 U2_J.4 U5_J.7 | length 1085.6
  Top Layer w8: U2_J.4 v1(2150,2750)
  Bottom Layer w8: TP1_J.6 U5_J.7 1360,2800 1418.47,2741.53 1617.2,2741.53 1626.73,2732 2130,2732 2148,2750 v1(2150,2750)
REG5_K: TP1_K.6 U2_K.4 U5_K.7 | length 1085.6
  Top Layer w8: U2_K.4 v1(3650,2750)
  Bottom Layer w8: TP1_K.6 U5_K.7 2858.47,2741.53 3117.2,2741.53 3126.73,2732 3630,2732 3648,2750 v1(3650,2750)
REG6_D: TP1_D.7 U2_D.5 U5_D.8 | length 1112.1
  Bottom Layer w8: TP1_D.7 U5_D.8 4341.53,2658.47 4691.53,2658.47 4750,2600 5200,2600 U2_D.5
REG6_J: TP1_J.7 U2_J.5 U5_J.8 | length 1112.1
  Bottom Layer w8: TP1_J.7 U5_J.8 1415,2700 1456.53,2658.47 1691.53,2658.47 1750,2600 2200,2600 U2_J.5
REG6_K: TP1_K.7 U2_K.5 U5_K.8 | length 1112.1
  Bottom Layer w8: TP1_K.7 U5_K.8 2841.53,2658.47 3191.53,2658.47 3250,2600 3700,2600 U2_K.5
REG7_D: TP1_D.8 U2_D.6 U5_D.9 | length 1230
  Bottom Layer w8: TP1_D.8 U5_D.9 4541.27,2600 4582.8,2641.53 4617.2,2641.53 4688.73,2570 5270,2570 U2_D.6
REG7_J: TP1_J.8 U2_J.6 U5_J.9 | length 1230
  Bottom Layer w8: TP1_J.8 U5_J.9 1541.27,2600 1582.8,2641.53 1617.2,2641.53 1688.73,2570 2270,2570 U2_J.6
REG7_K: TP1_K.8 U2_K.6 U5_K.9 | length 1230
  Bottom Layer w8: TP1_K.8 U5_K.9 3041.27,2600 3082.8,2641.53 3117.2,2641.53 3188.73,2570 3770,2570 U2_K.6
REG8_D: TP2_D.1 U3_D.3 U6_D.2 | length 891.4
  Bottom Layer w8: TP2_D.1 U6_D.2 4358.47,2158.47 5008.47,2158.47 U3_D.3
REG8_J: TP2_J.1 U3_J.3 U6_J.2 | length 891.4
  Bottom Layer w8: TP2_J.1 U6_J.2 1358.47,2158.47 2008.47,2158.47 U3_J.3
REG8_K: TP2_K.1 U3_K.3 U6_K.2 | length 891.4
  Bottom Layer w8: TP2_K.1 U6_K.2 2858.47,2158.47 3508.47,2158.47 U3_K.3
REG9_D: TP2_D.2 U3_D.4 U6_D.3 | length 1059
  Bottom Layer w8: TP2_D.2 U6_D.3 4341.53,2041.53 4482.8,2041.53 4558.47,2117.2 4582.8,2141.53 4688.47,2141.53 4720,2110 5060,2110 U3_D.4
REG9_J: TP2_J.2 U3_J.4 U6_J.3 | length 1059
  Bottom Layer w8: TP2_J.2 U6_J.3 1341.53,2041.53 1482.8,2041.53 1558.47,2117.2 1582.8,2141.53 1688.47,2141.53 1720,2110 2060,2110 U3_J.4
REG9_K: TP2_K.2 U3_K.4 U6_K.3 | length 1059
  Bottom Layer w8: TP2_K.2 U6_K.3 2841.53,2041.53 2982.8,2041.53 3058.47,2117.2 3082.8,2141.53 3188.47,2141.53 3220,2110 3560,2110 U3_K.4
REG10_D: TP2_D.3 U3_D.5 U6_D.4 | length 1436.4
  Top Layer w8: v1(5250,1870) 5250,1990 5291.53,2031.53 5291.53,2067.2 5250,2108.73 U3_D.5
  Bottom Layer w8: TP2_D.3 U6_D.4 4541.27,1900 4565.64,1875.64 4582.8,1858.47 4617.2,1858.47 4628.73,1870 v1(5250,1870)
REG10_J: TP2_J.3 U3_J.5 U6_J.4 | length 1436.4
  Top Layer w8: v1(2250,1870) 2250,1990 2291.53,2031.53 2291.53,2067.2 2250,2108.73 U3_J.5
  Bottom Layer w8: TP2_J.3 U6_J.4 1541.27,1900 1565.64,1875.64 1582.8,1858.47 1617.2,1858.47 1628.73,1870 v1(2250,1870)
REG10_K: TP2_K.3 U3_K.5 U6_K.4 | length 1436.4
  Top Layer w8: v1(3750,1870) 3750,1990 3791.53,2031.53 3791.53,2067.2 3750,2108.73 U3_K.5
  Bottom Layer w8: TP2_K.3 U6_K.4 3041.27,1900 3065.64,1875.64 3082.8,1858.47 3117.2,1858.47 3128.73,1870 v1(3750,1870)
REG11_D: TP2_D.4 U3_D.6 U6_D.5 | length 1562.2
  Top Layer w8: v1(5350,1840) 5350,1991.27 5391.53,2032.8 5391.53,2067.2 5350,2108.73 U3_D.6
  Bottom Layer w8: TP2_D.4 U6_D.5 4541.27,1800 4582.8,1841.53 5348.47,1841.53 v1(5350,1840)
REG11_J: TP2_J.4 U3_J.6 U6_J.5 | length 1562.2
  Top Layer w8: v1(2350,1840) 2350,1991.27 2391.53,2032.8 2391.53,2067.2 2350,2108.73 U3_J.6
  Bottom Layer w8: TP2_J.4 U6_J.5 1541.27,1800 1582.8,1841.53 2348.47,1841.53 v1(2350,1840)
REG11_K: TP2_K.4 U3_K.6 U6_K.5 | length 1562.2
  Top Layer w8: v1(3850,1840) 3850,1991.27 3891.53,2032.8 3891.53,2067.2 3850,2108.73 U3_K.6
  Bottom Layer w8: TP2_K.4 U6_K.5 3041.27,1800 3082.8,1841.53 3848.47,1841.53 v1(3850,1840)
REG12_D: TP2_D.5 U4_D.3 U6_D.6 | length 907.4
  Bottom Layer w8: TP2_D.5 U6_D.6 4341.53,1741.53 4600.26,1741.53 4653.07,1794.34 5005.66,1794.34 U4_D.3
REG12_J: TP2_J.5 U4_J.3 U6_J.6 | length 907.4
  Bottom Layer w8: TP2_J.5 U6_J.6 1341.53,1741.53 1600.26,1741.53 1653.07,1794.34 2005.66,1794.34 U4_J.3
REG12_K: TP2_K.5 U4_K.3 U6_K.6 | length 907.4
  Bottom Layer w8: TP2_K.5 U6_K.6 2841.53,1741.53 3100.26,1741.53 3153.07,1794.34 3505.66,1794.34 U4_K.3
REG13_D: TP2_D.6 U4_D.4 U6_D.7 | length 1312.6
  Top Layer w8: v1(5140,1500) 5140,1531.27 5191.53,1582.8 5191.53,1617.2 5184.36,1624.36 5150,1658.73 U4_D.4
  Bottom Layer w8: TP2_D.6 U6_D.7 4410,1490 4551.27,1490 4582.8,1458.47 4641.53,1458.47 4651.03,1448.97 4788.97,1448.97 4840,1500 5098.89,1500 5099.36,1499.53 5117.59,1499.53 5118.06,1500 v1(5140,1500)
REG13_J: TP2_J.6 U4_J.4 U6_J.7 | length 1312.6
  Top Layer w8: v1(2140,1500) 2140,1531.27 2191.53,1582.8 2191.53,1617.2 2184.36,1624.36 2150,1658.73 U4_J.4
  Bottom Layer w8: TP2_J.6 U6_J.7 1410,1490 1551.27,1490 1582.8,1458.47 1641.53,1458.47 1651.03,1448.97 1788.97,1448.97 1840,1500 2098.89,1500 2099.36,1499.53 2117.59,1499.53 2118.06,1500 v1(2140,1500)
REG13_K: TP2_K.6 U4_K.4 U6_K.7 | length 1312.6
  Top Layer w8: v1(3640,1500) 3640,1531.27 3691.53,1582.8 3691.53,1617.2 3684.36,1624.36 3650,1658.73 U4_K.4
  Bottom Layer w8: TP2_K.6 U6_K.7 2910,1490 3051.27,1490 3082.8,1458.47 3141.53,1458.47 3151.03,1448.97 3288.97,1448.97 3340,1500 3598.89,1500 3599.36,1499.53 3617.59,1499.53 3618.06,1500 v1(3640,1500)
REG14_D: TP2_D.7 U4_D.5 U6_D.8 | length 1461.7
  Top Layer w8: U4_D.5 5250,1658.73 5279.36,1629.36 5291.53,1617.2 5291.53,1582.8 5275.53,1566.8 v1(5275.53,1422) v1@5275.53,1420
  Bottom Layer w8: TP2_D.7 U6_D.8 4357.53,1442.47 4634.9,1442.47 4655.37,1422 v1(5275.53,1422)
REG14_J: TP2_J.7 U4_J.5 U6_J.8 | length 1461.7
  Top Layer w8: U4_J.5 2250,1658.73 2279.36,1629.36 2291.53,1617.2 2291.53,1582.8 2275.53,1566.8 v1(2275.53,1422) v1@2275.53,1420
  Bottom Layer w8: TP2_J.7 U6_J.8 1357.53,1442.47 1634.9,1442.47 1655.37,1422 v1(2275.53,1422)
REG14_K: TP2_K.7 U4_K.5 U6_K.8 | length 1461.7
  Top Layer w8: U4_K.5 3750,1658.73 3779.36,1629.36 3791.53,1617.2 3791.53,1582.8 3775.53,1566.8 v1(3775.53,1422) v1@3775.53,1420
  Bottom Layer w8: TP2_K.7 U6_K.8 2857.53,1442.47 3134.9,1442.47 3155.37,1422 v1(3775.53,1422)
REG15_D: TP2_D.8 U4_D.6 U6_D.9 | length 1580.5
  Top Layer w8: v1(5350,1380) 5350,1541.27 5391.53,1582.8 5391.53,1617.2 5350,1658.73 U4_D.6
  Bottom Layer w8: TP2_D.8 U6_D.9 4341.53,1358.47 4617.2,1358.47 4636.73,1378 5348,1378 v1(5350,1380)
REG15_J: TP2_J.8 U4_J.6 U6_J.9 | length 1580.5
  Top Layer w8: v1(2350,1380) 2350,1541.27 2391.53,1582.8 2391.53,1617.2 2350,1658.73 U4_J.6
  Bottom Layer w8: TP2_J.8 U6_J.9 1341.53,1358.47 1617.2,1358.47 1636.73,1378 2348,1378 v1(2350,1380)
REG15_K: TP2_K.8 U4_K.6 U6_K.9 | length 1580.5
  Top Layer w8: v1(3850,1380) 3850,1541.27 3891.53,1582.8 3891.53,1617.2 3850,1658.73 U4_K.6
  Bottom Layer w8: TP2_K.8 U6_K.9 2841.53,1358.47 3117.2,1358.47 3136.73,1378 3848,1378 v1(3850,1380)
RST: U1_D.15 U1_J.15 U1_K.15 U2_D.15 U2_J.15 U2_K.15 U3_D.15 U3_J.15 U3_K.15 U4_D.15 U4_J.15 U4_K.15 U8.4 | length 8461.6
  Top Layer w8: U4_J.15 1991.53,2091.53 1991.53,2238.47 1950,2280 U3_J.15 1991.53,2541.53 1991.53,2688.47 1950,2730 U2_J.15 1991.53,2991.53 1991.53,3138.47 1950,3180 U1_J.15 v1(1950,3490) ; U4_K.15 3491.53,2091.53 3491.53,2238.47 3450,2280 U3_K.15 3491.53,2541.53 3491.53,2688.47 3450,2730 U2_K.15 3491.53,2991.53 3491.53,3138.47 3450,3180 U1_K.15 v1(3450,3488.39) ; U4_D.15 4991.53,2091.53 4991.53,2238.47 v1(4965,2265) 4950,2280 U3_D.15 4991.53,2541.53 4991.53,2688.47 4950,2730 U2_D.15 4991.53,2991.53 4991.53,3138.47 4950,3180 U1_D.15 v1(4950,3488.39)
  Bottom Layer w8: v1(1950,3490) 1951.61,3488.39 2806.61,3488.39 2850,3445 3331.61,3445 3375,3488.39 v1(3450,3488.39) 3451.61,3486.79 4306.61,3486.79 4350,3443.39 4831.61,3443.39 4875,3486.79 v1@4950,3486.79 ; v1(4965,2265) 4980,2250 5650,2250 U8.4
RST#: P1.4 TP6.1 U8.3 | length 7213
  Top Layer w8: P1.4 1150,1450 1150,1200 1237.67,1112.33 1915.18,1112.33 1926.85,1124 5744,1124 5760,1140 5760,2240 U8.3 5760,2360 5760,3240 TP6.1
VCC: C1_D.1 C1_J.1 C1_K.1 C2_D.1 C2_J.1 C2_K.1 C3_D.1 C3_J.1 C3_K.1 C4_D.1 C4_J.1 C4_K.1 C5_D.1 C5_J.1 C5_K.1 C6_D.1 C6_J.1 C6_K.1 C7_D.1 C7_J.1 C7_K.1 C8.1 C9.1 P1.1 TP4.1 U1_D.16 U1_J.16 U1_K.16 U2_D.16 U2_J.16 U2_K.16 U3_D.16 U3_J.16 U3_K.16 U4_D.16 U4_J.16 U4_K.16 U5_D.1 U5_D.20 U5_J.1 U5_J.20 U5_K.1 U5_K.20 U6_D.1 U6_D.20 U6_J.1 U6_J.20 U6_K.1 U6_K.20 U7_D.14 U7_J.14 U7_K.14 U8.14 | length 20788.6
  Top Layer w20: C6_J.1 U6_J.20 1725,2075 C4_J.1 ; U5_J.20 C5_J.1 ; U1_J.16 1897.53,3352.47 1897.53,2997.53 U2_J.16 1897.53,2902.47 1897.53,2547.53 U3_J.16 1897.53,2452.47 1897.53,2097.53 U4_J.16 1897.53,2002.47 1897.53,1647.53 U7_J.14 1900,1550 1900,1149.47 v2(1899.86,1149.33) ; C6_K.1 U6_K.20 3225,2075 C4_K.1 ; U5_K.20 C5_K.1 ; U7_K.14 3397.53,1647.53 3397.53,2002.47 U4_K.16 3397.53,2097.53 3397.53,2452.47 U3_K.16 ; U3_K.16@3350,2510 3397.53,2557.53 3397.53,2912.47 U2_K.16@3355,2955 ; U2_K.16 U2_K.16@3355,2955 ; U2_K.16@3350,2960 U2_K.16@3355,2955 ; U1_K.16 3397.53,3352.47 3397.53,2997.53 U2_K.16@3355,2955 ; C6_D.1 U6_D.20 4725,2075 C4_D.1 ; U5_D.20 C5_D.1 ; U7_D.14 4897.53,1647.53 4897.53,2002.47 U4_D.16 4897.53,2097.53 4897.53,2452.47 U3_D.16 4897.53,2547.53 4897.53,2902.47 U2_D.16 4900,3000 4900,3350 U1_D.16 ; TP4.1 C8.1 U8.14 6150,2350 6150,1300 v2(6050,1200)
  Bottom Layer w20: P1.1 1182,1118 1868.53,1118 v2(1899.86,1149.33) 1900,1149.33 1900,1144.53 1926.53,1118 5968,1118 v2(6050,1200) ; C9.1 1155.63,3400 U5_J.1 U5_J.20 C1_J.1 U1_J.16 1910,3460 2740,3460 U5_K.1 U5_K.20 C1_K.1 U1_K.16 3410,3460 4240,3460 U5_D.1 U5_D.20 C1_D.1 U1_D.16 ; U6_J.1 U6_J.20 ; C7_J.1 U7_J.14 ; C4_J.1 U4_J.16 ; C3_J.1 U3_J.16 ; C2_J.1 U2_J.16 ; U6_K.1 U6_K.20 ; C7_K.1 U7_K.14 ; C4_K.1 U4_K.16 ; C3_K.1@3225,2510 U3_K.16@3350,2510 ; C2_K.1 U2_K.16 ; U6_D.1 U6_D.20 ; C7_D.1 U7_D.14 ; C4_D.1 U4_D.16 ; C3_D.1 U3_D.16 ; C2_D.1 U2_D.16
pads on no net: P1.20 U8.6

## Polygon pours and split planes (outlines as drawn)
GND on Top Layer "GND_L01_P000" (solid, remove dead copper, pour order 0): 1000,1000 1000,3700 6200,3700 6200,1000
GND on Bottom Layer "GND_L02_P001" (solid, remove dead copper, pour order 1): 1000,1000 1000,3700 6200,3700 6200,1000

## Keep-outs
Top Layer:
  rectangle: 1000,3600 6050,3700
  rectangle: 1000,1000 6050,1100
Bottom Layer:
  rectangle: 1000,1000 6050,1100
  rectangle: 1000,3600 6050,3700

## Silkscreen, mask and mechanical layers (free items; w line width, h text height)
Top Overlay:
  lines w5: 1050,1100 6000,1100 ; 1100,3600 1450,3600 ; 1580,1180 1650,1250 1650,1435 1675,1460 ; 1775,3600 2650,3600 ; 2750,3600 2950,3600 ; 3275,3600 4150,3600 ; 4250,3600 4450,3600 ; 4750,3600 6000,3600
  text "Scratch Registers / Rev A / E. SIMS" at 5000,3440 h45
Bottom Overlay:
  lines w5: 1050,1100 6000,1100 ; 1050,3600 6000,3600

## Text inside footprints (layer, text, board x,y; h text height)
C9: Top Overlay "+" at 1183.17,3402.12 h59.06 r270